# Altium PCB PCB.PcbDoc
Units mm, origin at the board's own origin, x right, y up, seen from the top; angles counter-clockwise.
Board outline 77.47 x 67.18 mm, 2 copper layers (Top Layer, Bottom Layer); 15 components, 27 nets, 99 pads, 16 vias.
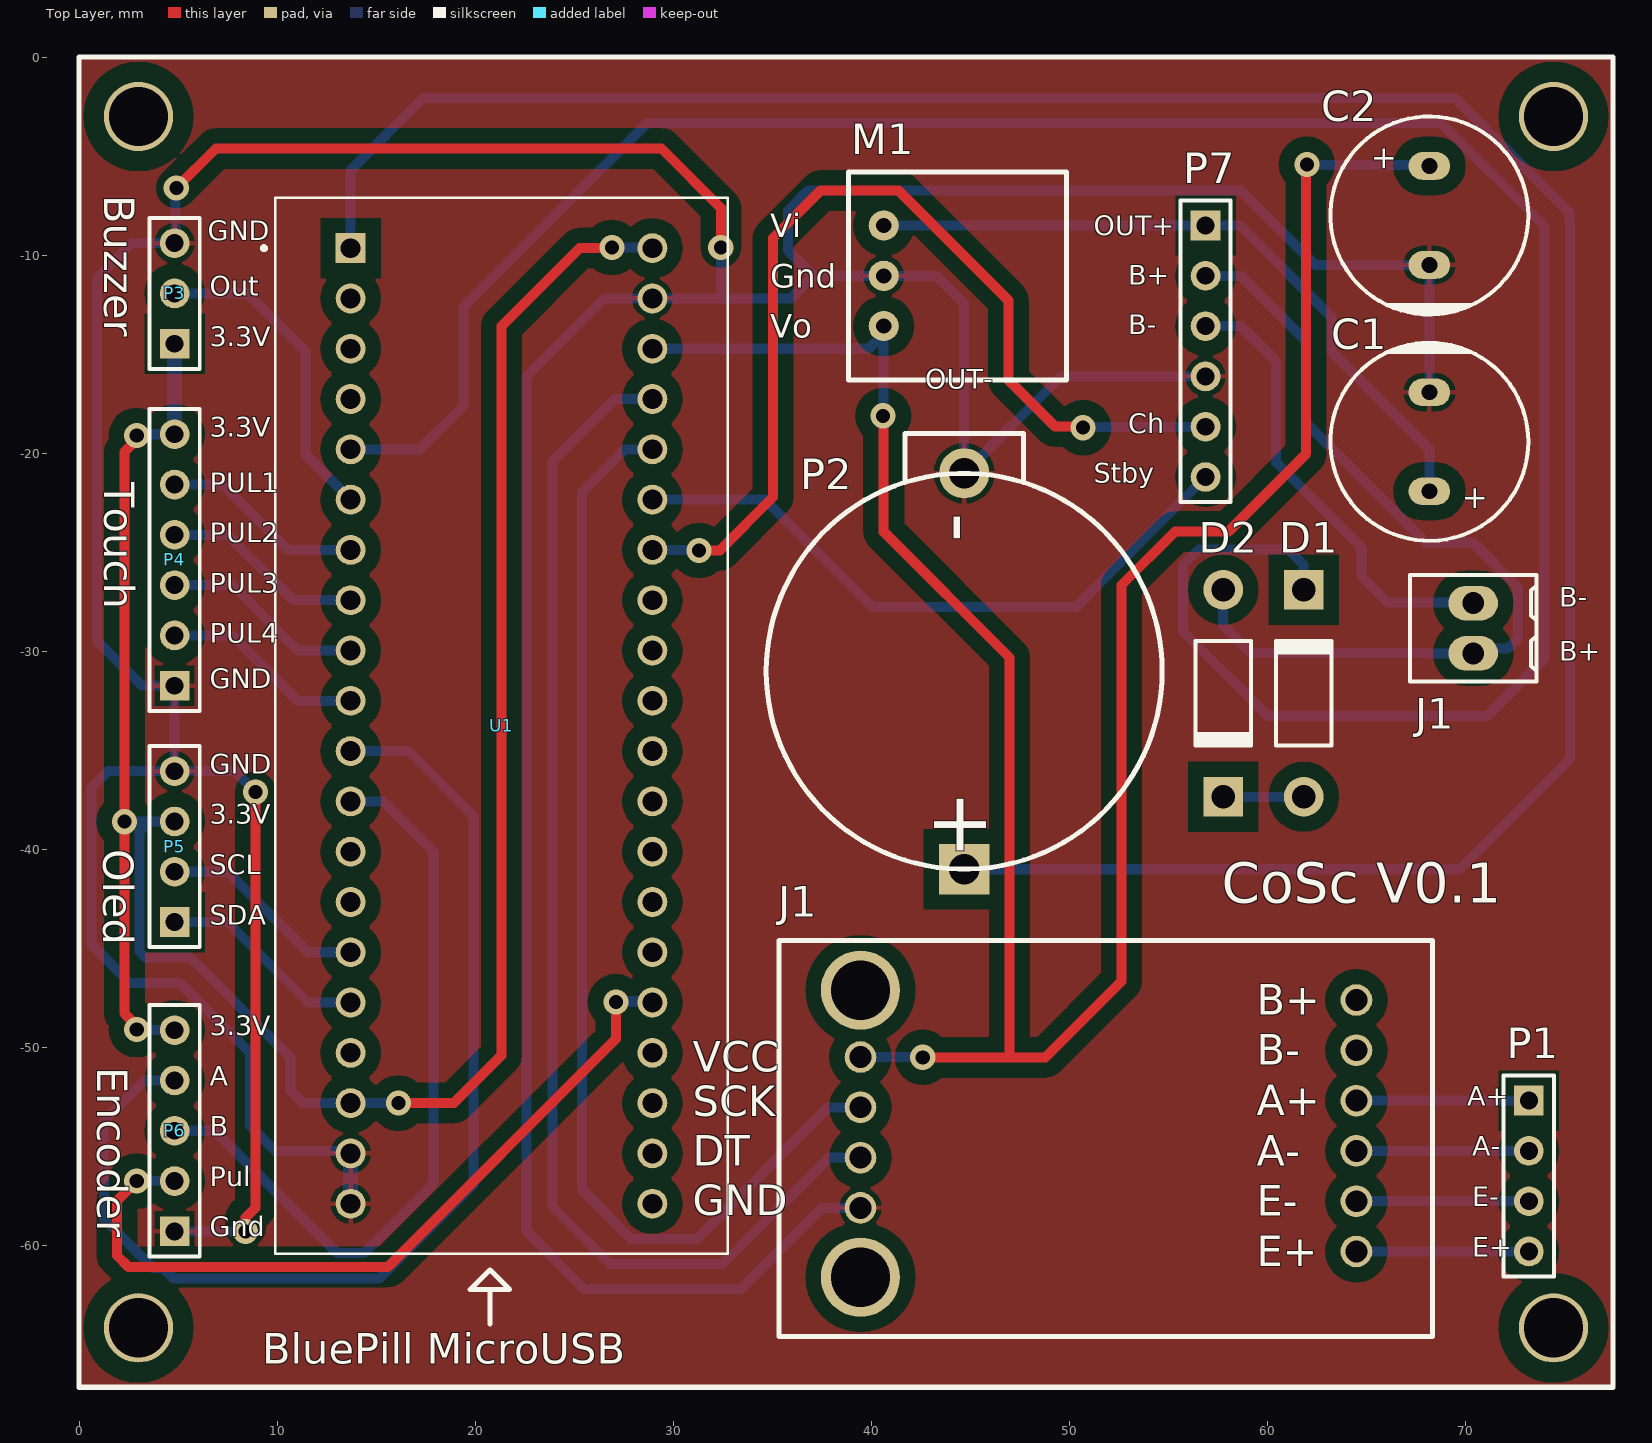
[diagram p0: Top Layer view]
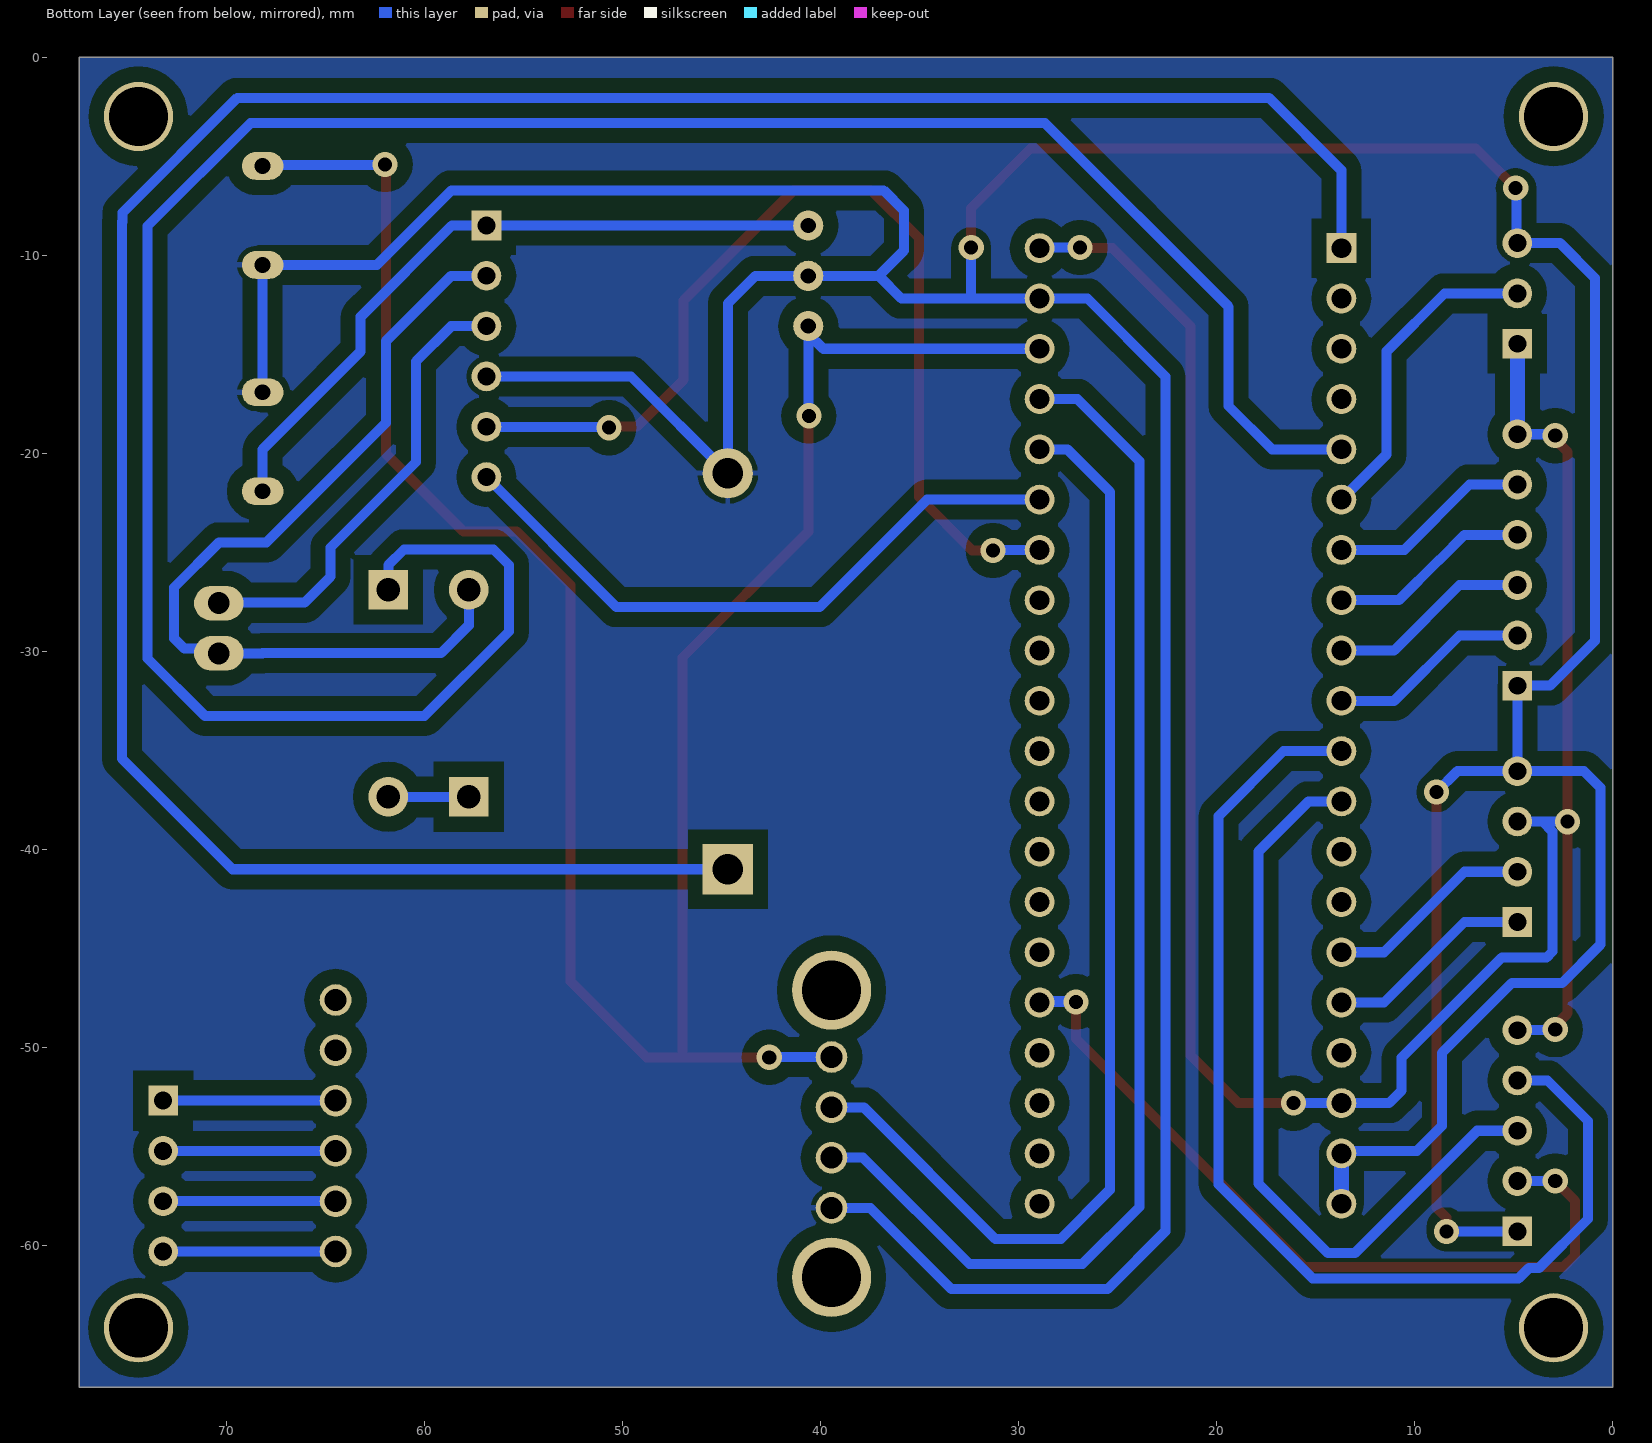
[diagram p1: Bottom Layer view, seen from below]

## Layer stack, top to bottom
Top Solder: solder mask 0.0102, Solder Resist, Dk 3.5
Top Layer: signal copper 0.0356
Dielectric 1: dielectric 0.32, FR-4, Dk 4.8
Bottom Layer: signal copper 0.0356
Bottom Solder: solder mask 0.0102, Solder Resist, Dk 3.5

## Board outline
0,-67.183 0,0 77.47,0 77.47,-67.183

## Design rules (kind name [scope] priority, off if disabled: settings)
Clearance [All] p1: gap=0.762 ignorepadtopadclearanceinfootprint=TRUE
PolygonConnect [All] p1: connectstyle=Relief reliefconductorwidth=0.254 reliefentries=4 polygonreliefangle="90 Angle" airgapwidth=0.254
RoutingVias [All] p1: holewidth=0.711 width=1.27 viastyle="Through Hole" minholewidth=0.711 minwidth=1.27 maxholewidth=0.711 maxwidth=1.27
SolderMaskExpansion [All] p1: expansion=0.102
Width [All] p1: maxlimit=0.635 minlimit=0.381 preferedwidth=0.508
30 further rules are at their usual default settings.

## Classes and differential pairs
component class Esquematico: C1 C2 D1 D2 J1 M1 P1 P2 P3 P4 P5 P6 P7 U1

## Components (designator, comment, footprint, x,y, rotation, side; value= is the part's Value field where it differs from the comment)
C1 "220µF" "CAP TH ALUM ELEC D10.00mm S5.00mm H12.50mm" 68.199,-19.431 r270 top
C2 "220µF" "CAP TH ALUM ELEC D10.00mm S5.00mm H12.50mm" 68.199,-8.001 r90 top
D1 "Diode 1N4007" DO-41 61.849,-32.131 r90 top
D2 "Diode 1N4007" DO-41 57.785,-32.131 r270 top
J1 "Hx711" HX711 68.366,-44.625 r180 top (schematic designator *J1)
J1 "282834-2" "TE 282834-2" 70.412,-28.849 r270 top
M1 "Step Up mini Vout=5V" "StepUp Mini 5V" 40.64,-13.589 r0 top
P1 "Header 4" HDR1X4 73.224,-52.705 r270 top
P2 "Batery Holder" "20mm Cell Holder" 44.704,-21.021 r270 top
P3 "Header 3" HDR1X3 4.826,-14.478 r90 top
P4 "Header 6" HDR1X6 4.826,-31.75 r90 top
P5 "Header 4" HDR1X4 4.826,-43.688 r90 top
P6 "Header 5" HDR1X5 4.826,-59.309 r90 top
P7 "Header 6" HDR1X6 56.896,-8.509 r270 top
U1 "BluePill MicroUSB" MODULE_ZC323000 21.336,-33.782 r0 top

## Footprints (in the part's own frame and the unit in brackets; to place one, negate y for a bottom-side part, rotate by r counter-clockwise, add the part's x,y. Pads: shape width x height; smd on the part's side, far side on the other; paste and mask are expansions set on the pad)
"20mm Cell Holder" [mil] "CR2032 Batery Holder - 23-BHCC-1"
  round 100 hole 60: 1(0,0)
  rect 100x100 hole 60: 2(787.4,0)
  silkscreen extent -79,-394 787,394
"CAP TH ALUM ELEC D10.00mm S5.00mm H12.50mm" [mm] "10mm Diameter 5mm Lead Spacing Aluminum Electrolytic Capacitors Radial, Can"
  oval 1.4x2.1 hole 0.8: 1(2.5,0) 2(-2.5,0)
  silkscreen extent -5,-5 5,5, body extent -5.01,-5 5,5, height 12.5
DO-41 [mm] "Diode, Axial; Body 5.2 x 2.7 mm (LxDia. max), Lead Dia. 0.86 mm (max)"
  round 2 hole 1.2: 1(-5.23,0)
  rect 2x2 hole 1.2: 2(5.23,0)
  silkscreen extent -2.65,-1.4 2.75,1.4
HDR1X3 [mm] "Connector; Header; 3 Position"
  rect 1.5x1.5 hole 0.9: 1(0,0)
  round 1.5 hole 0.9: 2(2.54,0) 3(5.08,0)
  silkscreen extent -1.27,-1.27 6.35,1.27
HDR1X4 [mm] "Connector; Header; 4 Position"
  rect 1.5x1.5 hole 0.9: 1(0,0)
  round 1.5 hole 0.9: 2(2.54,0) 3(5.08,0) 4(7.62,0)
  silkscreen extent -1.27,-1.27 8.89,1.27
HDR1X5 [mm] "Connector; Header; 5 Position"
  rect 1.5x1.5 hole 0.9: 1(0,0)
  round 1.5 hole 0.9: 2(2.54,0) 3(5.08,0) 4(7.62,0) 5(10.16,0)
  silkscreen extent -1.27,-1.27 11.43,1.27
HDR1X6 [mm] "Connector; Header; 6 Position"
  rect 1.5x1.5 hole 0.9: 1(0,0)
  round 1.5 hole 0.9: 2(2.54,0) 3(5.08,0) 4(7.62,0) 5(10.16,0) 6(12.7,0)
  silkscreen extent -1.27,-1.27 13.97,1.27
HX711 [mm]
  round 1.6 hole 1.1: 1(3.85,15.7) 2(3.85,13.16) 3(3.85,10.62) 4(3.85,8.08) 5(3.85,5.54) 6(3.85,3) 7(28.9,13.5) 8(28.9,10.96) 9(28.9,8.42) 10(28.9,5.88)
  round 4 hole 3: ""(28.9,2.5) ""(28.9,17)
  silkscreen extent 0,0 33.02,19.99, body extent -0.45,-0.71 33.55,20.29, height 3.05
MODULE_ZC323000 [mm]
  rect 1.508x1.508 hole 1: 1(-7.62,24.13)
  round 1.508 hole 1: 2(-7.62,21.59) 3(-7.62,19.05) 4(-7.62,16.51) 5(-7.62,13.97) 6(-7.62,11.43) 7(-7.62,8.89) 8(-7.62,6.35) 9(-7.62,3.81) 10(-7.62,1.27) 11(-7.62,-1.27) 12(-7.62,-3.81) 13(-7.62,-6.35) 14(-7.62,-8.89) 15(-7.62,-11.43) 16(-7.62,-13.97) 17(-7.62,-16.51) 18(-7.62,-19.05) 19(-7.62,-21.59) 20(-7.62,-24.13) 21(7.62,-24.13) 22(7.62,-21.59) 23(7.62,-19.05) 24(7.62,-16.51) 25(7.62,-13.97) 26(7.62,-11.43) 27(7.62,-8.89) 28(7.62,-6.35) 29(7.62,-3.81) 30(7.62,-1.27) 31(7.62,1.27) 32(7.62,3.81) 33(7.62,6.35) 34(7.62,8.89) 35(7.62,11.43) 36(7.62,13.97) 37(7.62,16.51) 38(7.62,19.05) 39(7.62,21.59) 40(7.62,24.13)
  silkscreen extent -12.1,-26.67 11.43,26.67
"StepUp Mini 5V" [mil] "StepUp mini 5V"
  round 60 hole 30: 1(0,200) 2(0,100) 3(0,0)
  silkscreen extent -70,-107 363,307
"TE 282834-2" [mm]
  oval 1.75x2.5 hole 1.1: 1(-1.27,0) 2(1.27,0)
  silkscreen extent -2.7,-3.2 2.7,3.2, body extent -2.77,-3.25 2.77,3.25, height 10

## Part data
C1 C2: library part UVZ1H221MPD, "CAP ALUM 220UF 20% 50V RADIAL", Device Package="Radial, Can", Lifetime @ Temp.="1000 Hrs @ 105°C", manufacturer=Nichicon, Operating Temperature="-55°C ~ 105°C", Ripple Current @ High Frequency="450mA @ 10kHz", Ripple Current @ Low Frequency="300mA @ 120Hz", Supplier Part Number 1=493-1342-ND, Tolerance=±20%, Voltage - Rated=50V, Applications="General Purpose", Capacitance=220µF, componentlink1description=Datasheet, componentlink1url=http://nichicon-us.com/english/products/pdfs/e-uvz.pdf, componentlink2description="DigiKey Link", componentlink2url=http://digikey.com/product-detail/en/nichicon/UVZ1H221MPD/493-1342-ND/589083, Height - Seated (Max)="0.492\" (12.50mm)", lastupdated="2/9/2020 01:31:04", Lead Spacing="0.197\" (5.00mm)", Lifecycle Status=Active, Minimum Order=1, Mounting Type="Through Hole", Package / Case="Radial, Can", packaging=Bulk, partid=10709, Part Number=UVZ1H221MPD, Part Status=Active, Polarization=Polar, price=0.41, series=UVZ, Size / Dimension="0.394\" Dia (10.00mm)", Supplier 1=DigiKey
D1 D2: "1 Amp General Purpose Rectifier", Code_JEDEC=DO-204-AL, componentlink1description="Manufacturer Link", componentlink1url=http://www.fairchildsemi.com/, componentlink2description=Datasheet, componentlink2url=http://www.fairchildsemi.com/ds/1N%2F1N4001.pdf, DatasheetVersion=1998, LatestRevisionDate=17-Jul-2002, LatestRevisionNote="Re-released for DXP Platform.", PackageDescription="Diode, Axial; Body 5.2 x 2.7 mm (LxDia. max), Lead Dia. 0.86 mm (max)", PackageReference=DO-41, PackageVersion=Aug-1999, Published=8-Jun-2000, Publisher="Altium Limited"
J1: "TERM BLK 2P SIDE ENT 2.54MM PCB", Color=Green, Current=10A, manufacturer="TE Connectivity AMP Connectors", Supplier Part Number 1=A98333-ND, Voltage=150V, componentlink1description=Datasheet, componentlink1url=https://www.te.com/commerce/DocumentDelivery/DDEController?Action=srchrtrv&DocNm=282834&DocType=Customer+Drawing&DocLang=English, componentlink2description="DigiKey Link", componentlink2url=http://digikey.com/product-detail/en/te-connectivity-amp-connectors/282834-2/A98333-ND/1150135, lastupdated="15/1/2020 04:15:38", Lifecycle Status=Active, Mating Orientation="Horizontal with Board", Minimum Order=1, Mounting Type="Through Hole", Number of Levels=1, packaging=Bulk, Part Number=282834-2, Part Status=Active, Pitch="0.100\" (2.54mm)", Positions Per Level=2, price=0.88, series=Buchanan, Supplier 1=DigiKey, Wire Gauge="16-30 AWG", Wire Termination="Screw - Rising Cage Clamp"
M1: library part "StepUp 5V"
P1 P5: "Header, 4-Pin", LatestRevisionDate=17-Jul-2002, LatestRevisionNote="Re-released for DXP Platform.", Publisher="Altium Limited"
P2: library part Component_1
P3: "Header, 3-Pin", LatestRevisionDate=17-Jul-2002, LatestRevisionNote="Re-released for DXP Platform.", Publisher="Altium Limited"
P4 P7: "Header, 6-Pin", LatestRevisionDate=17-Jul-2002, LatestRevisionNote="Re-released for DXP Platform.", Publisher="Altium Limited"
P6: "Header, 5-Pin", LatestRevisionDate=17-Jul-2002, LatestRevisionNote="Re-released for DXP Platform.", Publisher="Altium Limited"
U1: library part ZC323000, "STM32F103C8T6 ARM STM32 Minimum System Development Board Module For Arduino", Package=None, Availability=Unavailable, MP=ZC323000, price=None

## Free pads (board coordinates)
  round 3.5 hole 3: 2(3,-3) 2(3,-64.183) 2(74.47,-64.183) 2(74.47,-3)

## Via types
v1: diameter 1.27, hole 0.711, Top Layer to Bottom Layer, 16 vias

## Nets (pads, with @x,y where several pads share a name; then routed paths per layer and width w, separated by ;. In a path a pad name is that pad's centre, name@x,y a point inside that pad or via, vN(x,y) a via of type N, cw(c..) or ccw(c..) an arc to the next point about the centre after c; other vN are vias at no path point)
3.3V: P3.1 P4.6 P5.3 P6.5 U1.18 U1.40 | length 117.7
  Top Layer w0.508: v1(2.286,-38.619) 2.286,-48.287 2.912,-48.913 v1(2.912,-49.119) ; v1@2.286,-38.481 2.286,-19.951 2.912,-19.325 v1(2.912,-19.119) ; v1(16.125,-52.832) 18.923,-52.832 21.336,-50.419 21.336,-13.589 25.273,-9.652 26.879,-9.652 v1(26.912,-9.619)
  Bottom Layer w0.508: v1(2.286,-38.619) 2.291,-38.613 3.556,-38.613 ; v1(2.912,-49.119) 2.942,-49.149 P6.5 ; v1(2.912,-19.119) 2.981,-19.05 P4.6 ; P5.3 4.82,-38.613 3.556,-38.613 ; v1(16.125,-52.832) U1.18 11.303,-52.832 10.668,-52.197 10.668,-50.528 5.613,-45.473 3.346,-45.473 3.048,-45.175 3.048,-39.122 3.556,-38.613 ; v1(26.912,-9.619) 28.923,-9.619 U1.40
  Bottom Layer w0.762: P4.6 P3.1
5V: C2.1 J1.10 M1.3 U1.38 | length 119.3
  Top Layer w0.508: v1(40.612,-18.119) 40.64,-18.147 40.64,-23.978 46.99,-30.328 46.99,-50.441 46.912,-50.519 ; v1(42.612,-50.519) 46.912,-50.519 ; v1(62.012,-5.419) 61.976,-5.455 61.976,-20.041 58.064,-23.952 55.372,-23.952 52.654,-26.67 52.654,-46.677 48.812,-50.519 46.912,-50.519
  Bottom Layer w0.508: U1.38 39.878,-14.732 M1.3@40.626,-13.984 ; J1.10 39.473,-50.512 42.605,-50.512 v1(42.612,-50.519) ; v1(40.612,-18.119) 40.626,-18.105 M1.3@40.626,-13.984 ; M1.3 40.626,-13.603 M1.3@40.626,-13.984 ; v1(62.012,-5.419) 62.053,-5.46 68.158,-5.46 C2.1
A+: J1.4 P1.1 | length 8.7
  Bottom Layer w0.508: J1.4 P1.1
A-: J1.3 P1.2 | length 8
  Bottom Layer w0.508: J1.3@65.182,-55.245 P1.2
ADC: D1.2 U1.5 | length 126.4
  Bottom Layer w0.508: U1.5 17.219,-19.812 19.412,-17.619 19.412,-12.619 19.409,-12.616 28.697,-3.327 68.802,-3.327 74.012,-8.537 74.012,-30.382 71.12,-33.274 60.02,-33.274 55.753,-29.007 55.753,-25.654 56.54,-24.867 61.062,-24.867 61.849,-25.654 D1.2@61.849,-26.647
B+: D2.1 J1.2@70.412,-30.119 P7.2 | length 44.9
  Bottom Layer w0.508: P7.2 58.674,-11.049 61.976,-14.351 61.976,-18.485 68.002,-24.511 70.393,-24.511 72.678,-26.796 72.678,-29.353 72.15,-29.881 70.65,-29.881 70.412,-30.119 68.219,-30.119 68.199,-30.099 59.182,-30.099 57.785,-28.702 D2.1
B-: J1.1@70.412,-27.579 P7.3 | length 23.2
  Bottom Layer w0.508: P7.3 58.674,-13.589 60.452,-15.367 60.452,-20.447 64.77,-24.765 64.77,-26.245 66.084,-27.559 70.392,-27.559 J1.1@70.412,-27.579
CHARGE: P7.5 U1.34 | length 50.5
  Top Layer w0.508: v1(31.312,-24.919) 32.358,-24.919 35.052,-22.225 35.052,-9.144 37.465,-6.731 41.376,-6.731 46.932,-12.286 46.932,-16.299 49.302,-18.669 50.662,-18.669 v1(50.712,-18.719)
  Bottom Layer w0.508: U1.34 28.969,-24.906 31.298,-24.906 v1(31.312,-24.919) ; v1(50.712,-18.719) 50.737,-18.694 56.871,-18.694 P7.5
E+: J1.1@64.516,-60.325 P1.4 | length 8
  Bottom Layer w0.508: J1.1@65.182,-60.325 P1.4
E-: J1.2@64.516,-57.785 P1.3 | length 8
  Bottom Layer w0.508: J1.2@65.182,-57.785 P1.3
GND: C1.2 C2.2 J1.7 M1.2 P2.1 P3.3 P4.1 P5.4 P6.1 P7.4 U1.19 U1.20 U1.39 | length 289.8
  Top Layer w0.508: v1(4.912,-6.619) 6.912,-4.619 29.412,-4.619 32.412,-7.619 v1(32.412,-9.619) ; v1@8.412,-59.119 8.412,-58.619 8.912,-58.119 v1(8.912,-37.119)
  Bottom Layer w0.508: P6.1 v1@8.222,-59.309 ; v1(4.912,-6.619) 4.869,-6.662 4.869,-9.355 P3.3 2.667,-9.398 0.912,-11.153 0.912,-29.487 3.175,-31.75 P4.1 P5.4 ; v1(8.412,-59.309) v1@8.222,-59.309 ; v1@8.412,-59.119 v1@8.222,-59.309 ; v1(8.912,-37.119) 7.861,-36.068 P5.4 ; U1.19 13.589,-55.245 9.906,-55.245 8.636,-53.975 8.636,-50.292 5.105,-46.761 2.565,-46.761 0.635,-44.831 0.635,-36.896 1.463,-36.068 P5.4 ; v1(32.412,-9.619) 32.412,-12.192 ; J1.7 37.506,-58.125 33.401,-62.23 25.527,-62.23 22.606,-59.309 22.606,-16.129 26.543,-12.192 U1.39 32.412,-12.192 ; P7.4 49.596,-16.129 P2.1 44.704,-12.446 43.307,-11.049 M1.2 37.084,-11.049 ; C1.2@67.818,-16.931 C1.2 C2.2 62.432,-10.501 58.662,-6.731 36.83,-6.731 35.814,-7.747 35.814,-9.779 37.084,-11.049 ; 32.412,-12.192 35.941,-12.192 37.084,-11.049
  Bottom Layer w0.762: U1.20 U1.19
NetD1_1: D1.1 D2.2 | length 4.3
  Bottom Layer w0.508: D2.2 D1.1
  Bottom Layer w0.762: D2.2 D2.2@57.785,-37.107
NetP3_2: P3.2 U1.6 | length 16.3
  Bottom Layer w0.508: P3.2 8.509,-11.938 11.43,-14.859 11.43,-20.066 U1.6
NetP4_2: P4.2 U1.10 | length 10.3
  Bottom Layer w0.508: P4.2 7.747,-29.21 11.049,-32.512 U1.10
NetP4_3: P4.3 U1.9 | length 10.3
  Bottom Layer w0.508: P4.3 7.747,-26.67 11.049,-29.972 U1.9
NetP4_4: P4.4 U1.8 | length 10.3
  Bottom Layer w0.508: P4.4 7.493,-24.13 8.763,-25.4 8.781,-25.4 10.813,-27.432 U1.8
NetP4_5: P4.5 U1.7 | length 10.3
  Bottom Layer w0.508: P4.5 7.239,-21.59 10.541,-24.892 U1.7
NetP6_2: P6.2 U1.25 | length 42.3
  Top Layer w0.508: v1@2.912,-56.619 v1(2.912,-56.769) 1.912,-57.769 1.912,-60.523 2.508,-61.119 15.589,-61.119 27.112,-49.596 v1(27.112,-47.719) v1@27.312,-47.719 ; v1@27.312,-47.719 v1@27.412,-47.619
  Bottom Layer w0.508: v1(2.912,-56.769) P6.2 P6.2@4.751,-56.694 ; v1@2.912,-56.619 v1@2.987,-56.694 ; v1(27.112,-47.719) 28.923,-47.719 U1.25 28.889,-47.686 27.478,-47.686 v1@27.412,-47.619
NetP6_3: P6.3 U1.12 | length 39.1
  Bottom Layer w0.508: P6.3 6.858,-54.229 13.04,-60.411 14.396,-60.411 17.912,-56.895 17.912,-40.137 15.367,-37.592 U1.12
NetP6_4: P6.4 U1.11 | length 57.4
  Bottom Layer w0.508: P6.4 3.302,-51.689 1.261,-53.73 1.261,-58.681 3.747,-61.167 4.249,-61.167 4.763,-61.681 15.18,-61.681 19.912,-56.948 19.912,-38.327 16.637,-35.052 U1.11
OUT+: C1.1 M1.1 P7.1 | length 35.4
  Bottom Layer w0.508: M1.1 P7.1 58.644,-8.509 63.246,-13.111 63.246,-14.859 68.199,-19.812 C1.1
PB8: J1.9 U1.36 | length 57.5
  Bottom Layer w0.508: U1.36 27.559,-19.812 25.412,-21.959 25.412,-57.213 27.889,-59.69 31.193,-59.69 37.838,-53.045 J1.9
PB9: J1.8 U1.37 | length 63
  Bottom Layer w0.508: U1.37 27.051,-17.272 23.912,-20.411 23.912,-58.075 26.797,-60.96 32.503,-60.96 37.878,-55.585 J1.8
SCL: P5.2 U1.15 | length 10.6
  Bottom Layer w0.508: P5.2 7.493,-41.148 11.557,-45.212 U1.15
SDA: P5.1 U1.16 | length 10.6
  Bottom Layer w0.508: P5.1 7.493,-43.688 11.557,-47.752 U1.16
STANDBY: P7.6 U1.35 | length 32.9
  Bottom Layer w0.508: U1.35 34.645,-22.352 40.075,-27.782 50.323,-27.782 P7.6
Vbat: P2.2 U1.1 | length 130
  Bottom Layer w0.508: U1.1 13.716,-5.715 17.374,-2.057 69.478,-2.057 75.282,-7.861 75.282,-8.335 75.312,-8.305 75.312,-8.537 75.312,-35.432 69.723,-41.021 P2.2
pads on no net: J1. J1.5 J1.6 U1.2 U1.3 U1.4 U1.13 U1.14 U1.17 U1.21 U1.22 U1.23 U1.24 U1.26 U1.27 U1.28 U1.29 U1.30 U1.31 U1.32 U1.33

## Polygon pours and split planes (outlines as drawn)
GND on Bottom Layer "Bottom Layer-GND" (solid, pour order 16): 0,-67.183 0,0 77.47,0 77.47,-67.183
GND on Top Layer "Top Layer-GND" (solid, pour order 10): 0,0 77.47,0 77.47,-67.183 0,-67.183 0,0

## Silkscreen, mask and mechanical layers (free items; w line width, h text height)
Top Overlay:
  lines w0.254: 20.75,-64 20.75,-62.25 ; 20.75,-62.25 21.75,-62.25 20.75,-61.25 ; 20.75,-62.25 19.75,-62.25 20.75,-61.25 ; 20.75,-61.25 20.75,-61.25 ; 0,-67.183 77.47,-67.183 77.47,0 0,0 0,-67.183
  text "Buzzer" at 1.27,-6.985 h1.52 r270
  text "OUT+" at 51.25,-9 h1
  text "GND" at 6.5,-9.25 h1
  text "B+" at 53,-11.5 h1
  text "Out" at 6.604,-12.065 h1
  text "B-" at 53,-14 h1
  text "3.3V" at 6.604,-14.605 h1
  text "OUT-" at 42.75,-16.75 h1
  text "Ch" at 53,-19 h1
  text "3.3V" at 6.604,-19.177 h1
  text "Touch" at 1.27,-21.463 h1.52 r270
  text "Stby" at 51.25,-21.5 h1
  text "PUL1" at 6.604,-21.971 h1
  text "PUL2" at 6.604,-24.511 h1
  text "PUL3" at 6.604,-27.051 h1
  text "B-" at 74.75,-27.75 h1
  text "PUL4" at 6.604,-29.591 h1
  text "B+" at 74.75,-30.5 h1
  text "GND" at 6.604,-31.877 h1
  text "GND" at 6.604,-36.195 h1
  text "3.3V" at 6.604,-38.735 h1
  text "Oled" at 1.212,-40.019 h1.52 r270
  text "SCL" at 6.604,-41.275 h1
  text "CoSc V0.1" at 57.712,-42.719 h2.03
  text "SDA" at 6.604,-43.815 h1
  text "3.3V" at 6.604,-49.403 h1
  text "Encoder" at 0.912,-51.019 h1.52 r270
  text "A" at 6.604,-51.943 h1
  text "A+" at 70.104,-52.959 h1
  text "B" at 6.604,-54.483 h1
  text "A-" at 70.358,-55.499 h1
  text "Pul" at 6.604,-57.023 h1
  text "E-" at 70.358,-58.039 h1
  text "Gnd" at 6.604,-59.563 h1
  text "E+" at 70.358,-60.579 h1

## Text inside footprints (layer, text, board x,y; h text height)
C1: Top Overlay "+" at 69.599,-21.631 h2 r270
C2: Top Overlay "+" at 66.799,-5.801 h2 r90
J1: Top Overlay "GND" at 31,-58.5 h1.52; Top Overlay "DT" at 31,-56 h1.52; Top Overlay "SCK" at 31,-53.5 h1.52; Top Overlay "VCC" at 31,-51.25 h1.52; Top Overlay "B+" at 59.492,-48.363 h1.52; Top Overlay "B-" at 59.492,-50.903 h1.52; Top Overlay "A+" at 59.492,-53.443 h1.52; Top Overlay "A-" at 59.492,-55.983 h1.52; Top Overlay "E-" at 59.492,-58.523 h1.52; Top Overlay "E+" at 59.492,-61.063 h1.52
M1: Top Overlay "Vi" at 34.918,-9.109 h1.2; Top Overlay "Gnd" at 34.918,-11.649 h1.2; Top Overlay "Vo" at 34.918,-14.189 h1.2
P2: Top Overlay "+" at 43.18,-37.021 h3.05 r270; Top Overlay "-" at 43.18,-23.021 h3.05 r270